# Altium PCB Version_1.PcbDoc
Units mm, origin at the board's own origin, x right, y up, seen from the top; angles counter-clockwise.
Board outline 60.25 x 52.52 mm, 2 copper layers (Top Layer, Bottom Layer); 28 components, 18 nets, 106 pads, 14 vias.
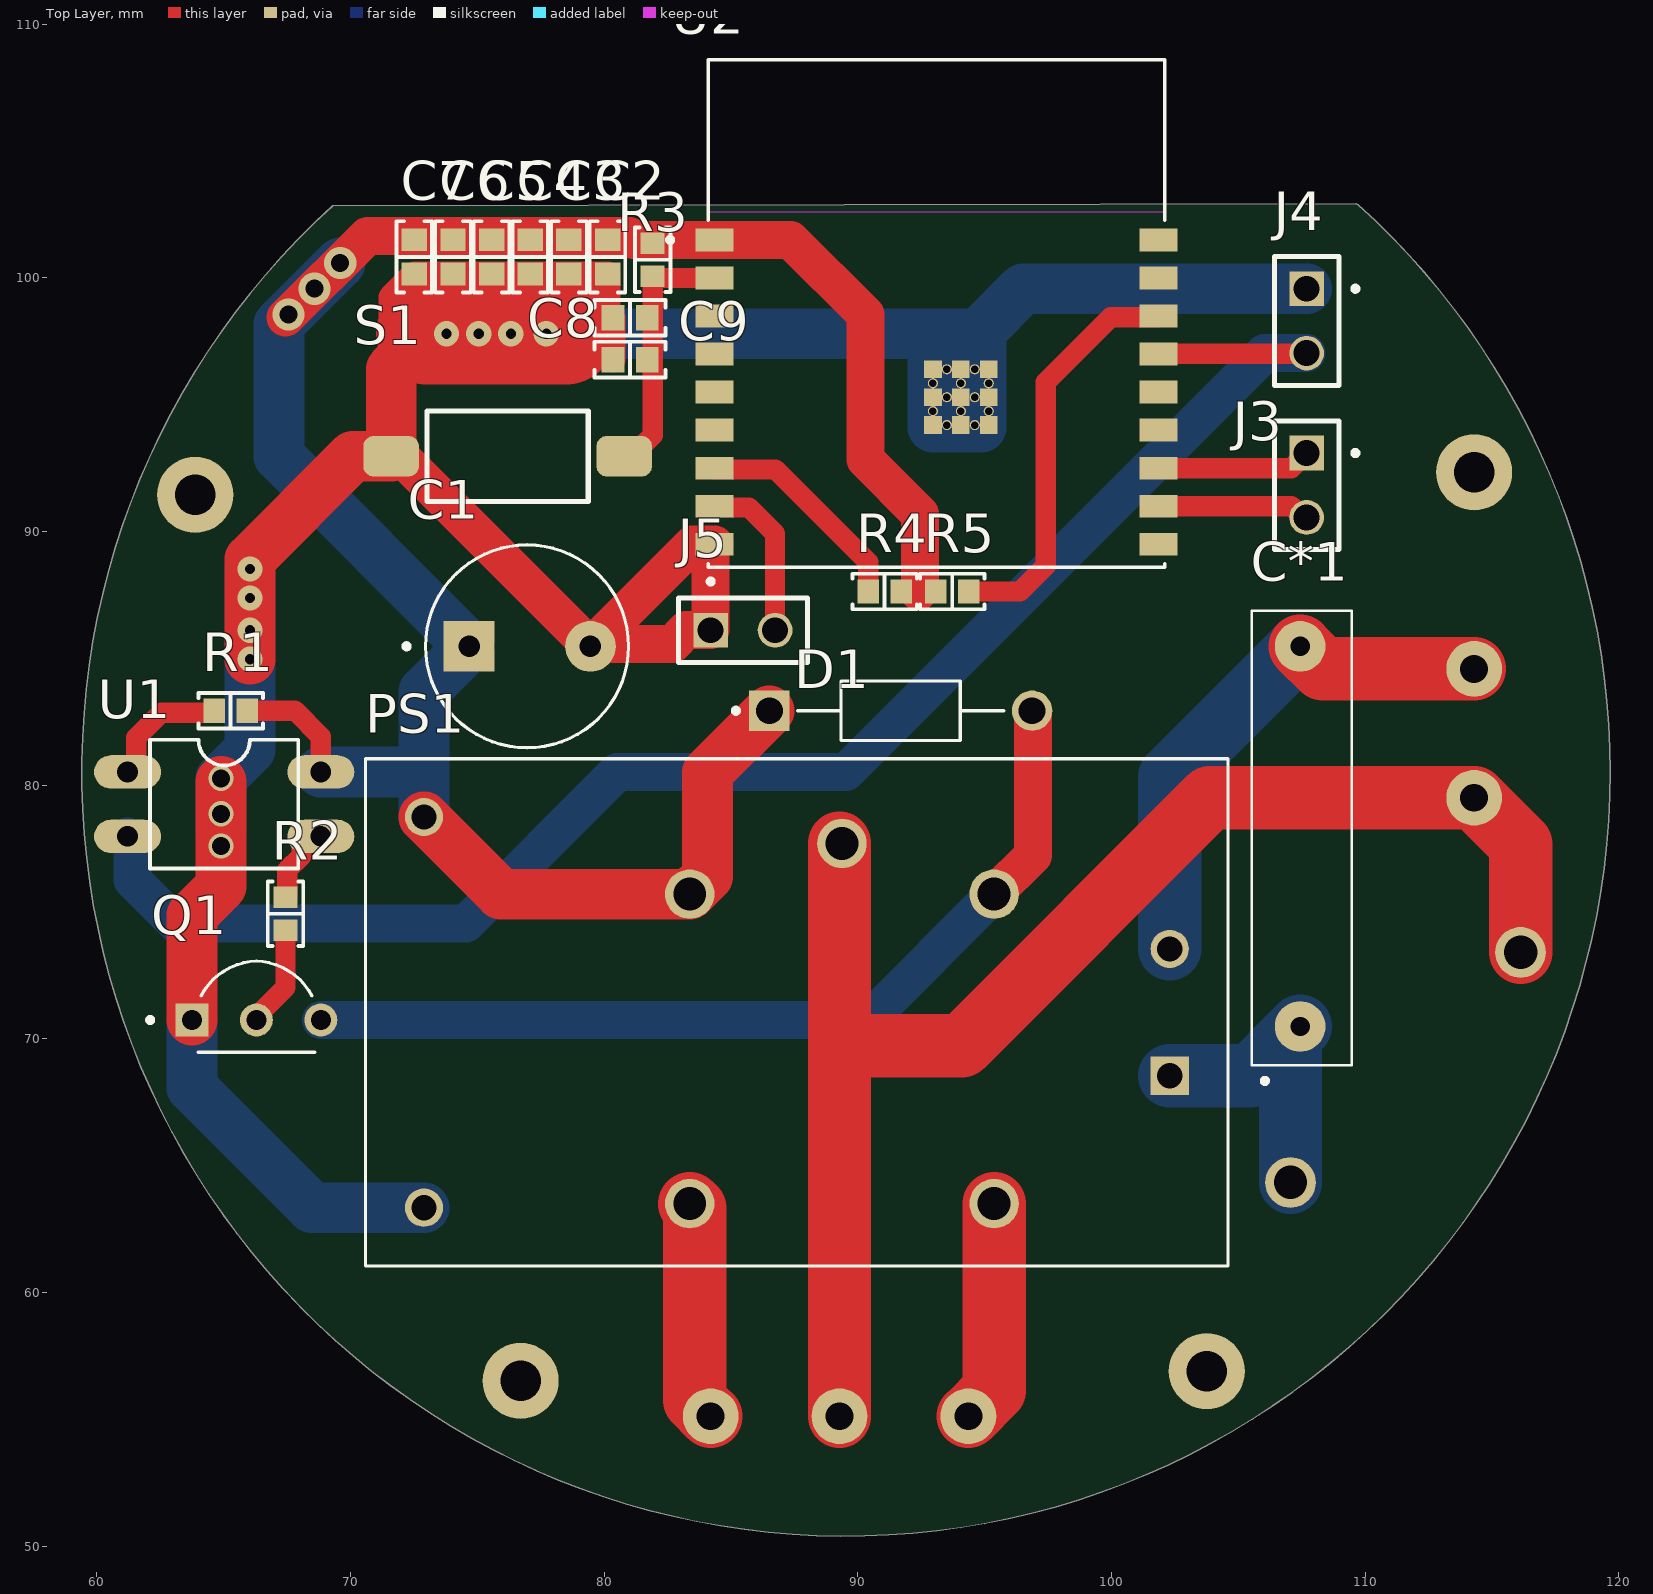
[diagram p0: Top Layer view]
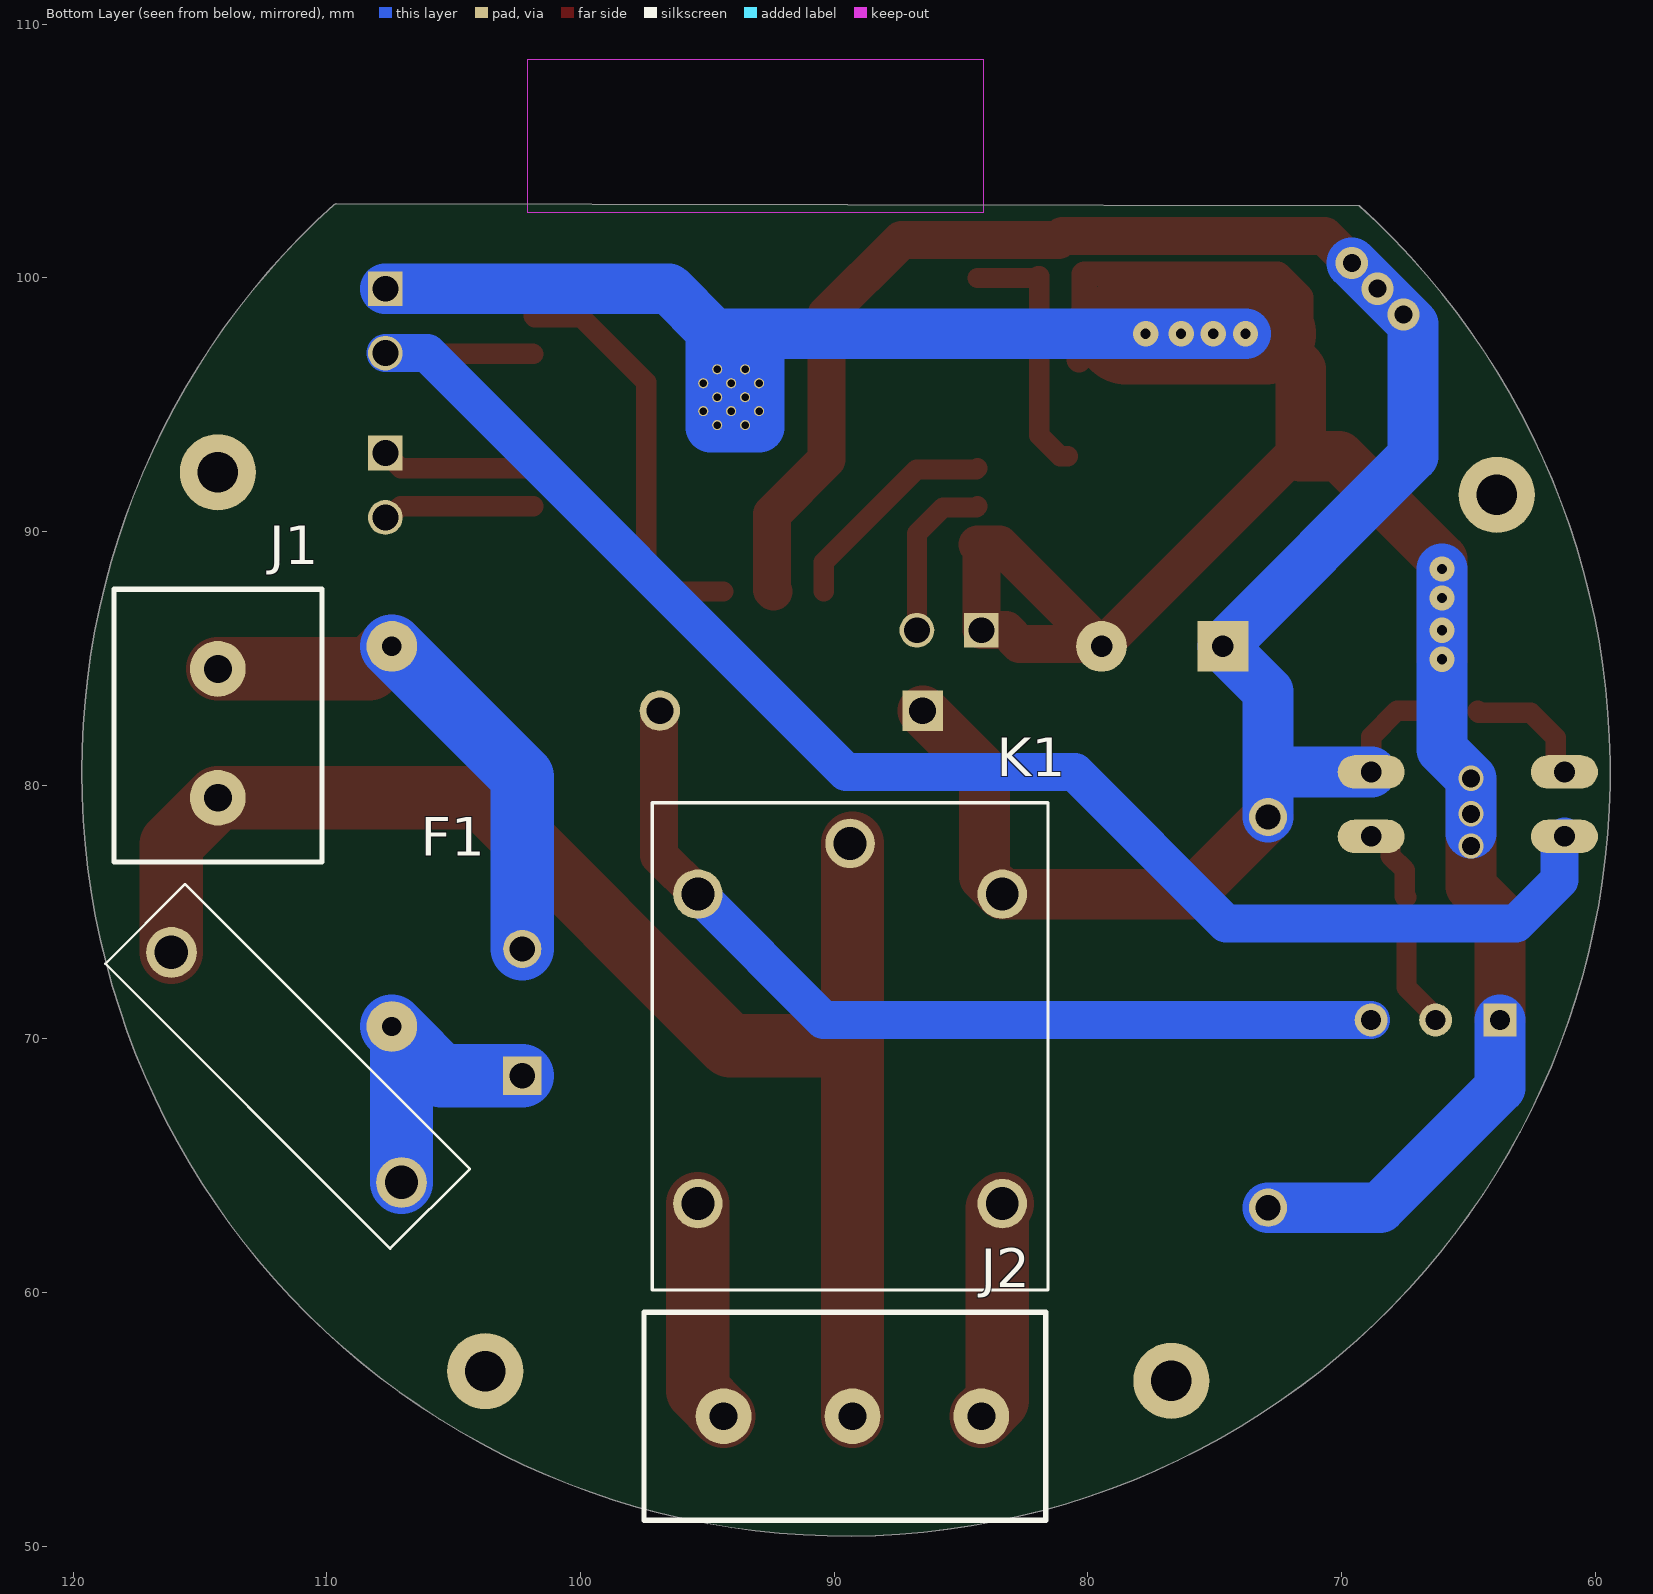
[diagram p1: Bottom Layer view, seen from below]
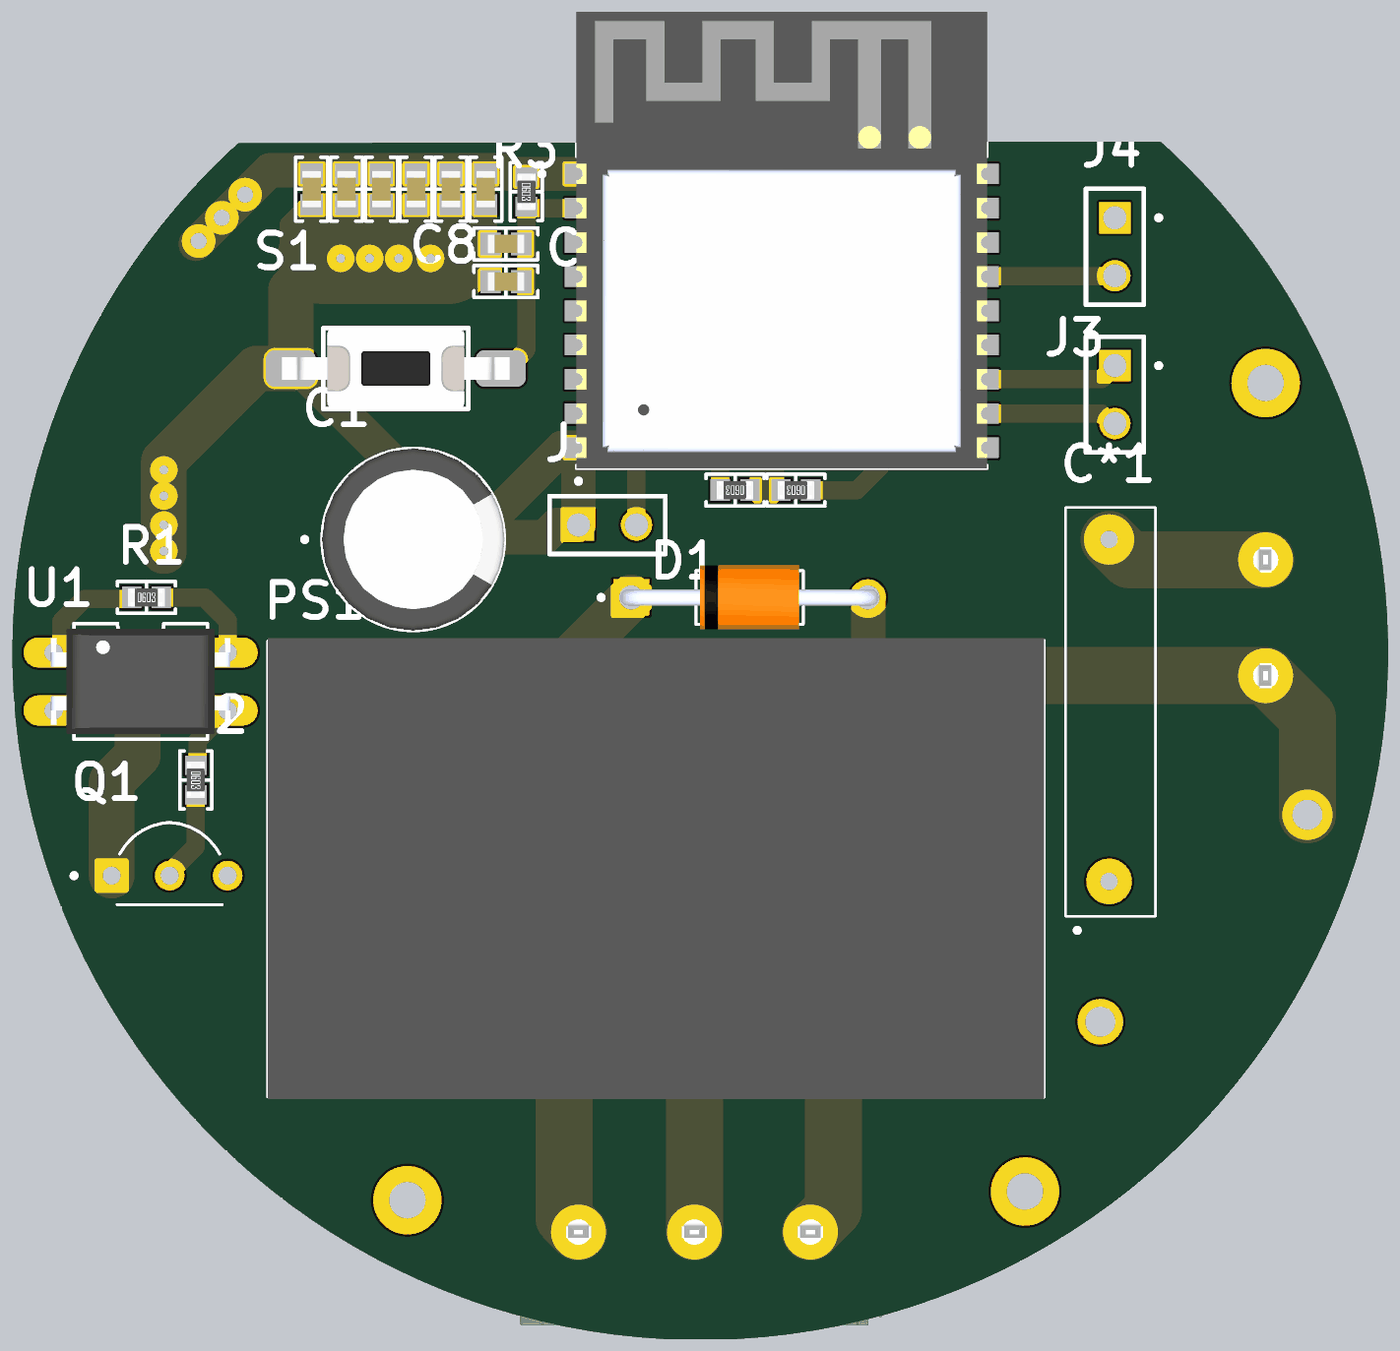
[diagram p2: 3D render of the assembled board from above, using the file's embedded part models]

## Layer stack, top to bottom
Top Solder: solder mask 0.0102, Solder Resist, Dk 3.5
Top Layer: signal copper 0.0356
Dielectric 1: dielectric 0.32, FR-4, Dk 4.8
Bottom Layer: signal copper 0.0356
Bottom Solder: solder mask 0.0102, Solder Resist, Dk 3.5

## Board outline
69.301,102.839 ccw(c89.535,80.518) 119.662,80.518 ccw(c89.535,80.518) 109.722,102.882 109.637,102.915

## Design rules (kind name [scope] priority, off if disabled: settings)
Clearance [All] p1: gap=0.254 ignorepadtopadclearanceinfootprint=FALSE except(0: Arc-Hole Track-Hole SMDPad-Hole THPad-Hole Via-Hole Fill-Hole Poly-Hole Region-Hole Text-Hole)
PolygonConnect [All] p1: connectstyle=Relief reliefconductorwidth=0.254 reliefentries=4 polygonreliefangle="90 Angle" airgapwidth=0.254
RoutingVias [All] p1: holewidth=0.711 width=1.27 viastyle="Through Hole" minholewidth=0.711 minwidth=1.27 maxholewidth=0.711 maxwidth=1.27
SolderMaskExpansion [All] p1: expansion=0.102 istentingtop=FALSE
Width [All] p1: maxlimit=5 minlimit=0.254 preferedwidth=0.6 minimp=50.000000 maximp=50.000000 favimp=50.000000
30 further rules are at their usual default settings.

## Classes and differential pairs
component class Sheet1: C1 C2 C3 C4 C7 C8 C9 C*1 D1 F1 J1 J2 J3 J5 K1 PS1 Q1 R1 R2 R3 R4 R5 S1 U1 U2

## Components (designator, comment, footprint, x,y, rotation, side; value= is the part's Value field where it differs from the comment)
C1 "EEUFS2A330B" CAPPRD500W60D800H1150 76.962,85.471 r0 top
C2 "1 µF" "CAP 0603_1608" 80.137,100.824 r90 top
C3 "1 µF" "CAP 0603_1608" 78.613,100.824 r90 top
C4 "1 µF" "CAP 0603_1608" 77.089,100.824 r90 top
C5 "1 µF" "CAP 0603_1608" 75.565,100.824 r90 top
C6 "1 µF" "CAP 0603_1608" 74.041,100.824 r90 top
C7 "1 µF" "CAP 0603_1608" 72.517,100.824 r90 top
C8 "1 µF" "CAP 0603_1608" 81.026,96.774 r180 top
C9 "1 µF" "CAP 0603_1608" 81.026,98.425 r0 top
C*1 "Capacitance_Filter" Capacitance_Filter 107.315,78.486 r90 top
D1 "1N4001G" DIOAD1036W78L470D235 91.694,82.931 r0 top
F1 "Fuse 4x11" "Fuse 4x11" 112.268,69.723 r225 bottom
J1 "282837-2" "TE 282837-2" 114.3,82.042 r90 bottom
J2 "282837-3" "TE 282837-3" 89.281,55.118 r0 bottom
J3 "TSW-101-23-T-D" SAMTEC_TSW-101-23-T-D 107.696,93.091 r180 top
J4 "TSW-101-23-T-D" SAMTEC_TSW-101-23-T-D 107.696,99.568 r180 top
J5 "TSW-101-23-T-D" SAMTEC_TSW-101-23-T-D 84.201,86.106 r270 top
K1 "SRD-03VDC-SL-C" RELAY_SRD-03VDC-SL-C 89.377,69.7 r270 bottom
PS1 "HLK-PM03" CONV_HLK-PM03 87.598,71.04 r180 top
Q1 "2N2222A" TO92254P470H750-3 66.294,73.069 r0 top
R1 "1 kOhms" "RES 0603_1608" 65.278,82.931 r0 top
R2 "1 kOhms" "RES 0603_1608" 67.437,74.93 r270 top
R3 "10 kOhms" "RES 0603_1608" 81.915,100.711 r270 top
R4 "10 kOhms" "RES 0603_1608" 91.059,87.63 r180 top
R5 "10 kOhms" "RES 0603_1608" 93.726,87.63 r180 top
S1 "FSMSM" "TE FSMSMTR" 76.2,92.964 r270 top
U1 "PC817X3NSZ9F" DIL04 65.024,79.248 r270 top
U2 "ESP32-C3-WROOM-02-N4" "MODULE_ESP32-C3-WROOM-02-H4 - duplicate" 93.104,98.592 r0 top

## Footprints (in the part's own frame and the unit in brackets; to place one, negate y for a bottom-side part, rotate by r counter-clockwise, add the part's x,y. Pads: shape width x height; smd on the part's side, far side on the other; paste and mask are expansions set on the pad)
"CAP 0603_1608" [mm] "Chip Capacitor, 2-Leads, Body 1.60x0.80mm, IPC Medium Density"
  rect 0.9x1 smd: 1(-0.675,0) 2(0.675,0)
  silkscreen extent -1.4,-0.7 1.4,0.7, body extent -0.8,-0.41 0.8,0.41, height 0.82
Capacitance_Filter [mil]
  round 78.74 hole 30: 1(-315,-5) 2(275,-5)
  silkscreen extent -375,-85 330,70
CAPPRD500W60D800H1150 [mm]
  round 2 hole 0.85: N(2.5,0)
  rect 2x2 hole 0.85: P(-2.286,0)
  silkscreen extent -4.85,-4 4,4, body extent -4,-4 4,4, height 11.5
CONV_HLK-PM03 [mm]
  rect 1.508x1.508 / inner round 1.508 / far side rect 1.508x1.508 hole 1: 1(-14.7,2.5)
  round 1.508 hole 1: 2(-14.7,-2.5) 3(14.7,7.7) 4(14.7,-7.7)
  silkscreen extent -18.55,-10 17,10, body extent -17,-10.1 17,10.1, height 20
DIL04 [mil]
  oval 52x104 hole 32: 1(-50,-150) 2(50,-150) 3(50,150) 4(-50,150)
  silkscreen extent -100,-115 100,115, body extent -91,-155 91,155, height 179
DIOAD1036W78L470D235 [mm]
  round 1.59 hole 1.06: A(5.18,0)
  rect 1.59x1.59 hole 1.06: C(-5.18,0)
  silkscreen extent -6.6,-1.17 4.07,1.17, body extent -5.65,-1.4 5.65,1.4, height 2.8
"Fuse 4x11" [mm]
  round 2 hole 1.32: 1(-5.334,-0.127) 2(7.493,-0.127)
  silkscreen extent -6.86,-2.29 9.02,2.16
"MODULE_ESP32-C3-WROOM-02-H4 - duplicate" [mm]
  rect 1.5x0.9 smd: 1(-8.75,2.9) 2(-8.75,1.4) 3(-8.75,-0.1) 4(-8.75,-1.6) 5(-8.75,-3.1) 6(-8.75,-4.6) 7(-8.75,-6.1) 8(-8.75,-7.6) 9(-8.75,-9.1) 10(8.75,-9.1) 11(8.75,-7.6) 12(8.75,-6.1) 13(8.75,-4.6) 14(8.75,-3.1) 15(8.75,-1.6) 16(8.75,-0.1) 17(8.75,1.4) 18(8.75,2.9)
  rect 0.7x0.7 smd: 19(-0.14,-2.2) 20(0.96,-2.2) 21(2.06,-2.2) 22(-0.14,-3.3) 23(0.96,-3.3) 24(2.06,-3.3) 25(-0.14,-4.4) 26(0.96,-4.4) 27(2.06,-4.4)
  round 0.4 hole 0.3 mask+0: 28(0.41,-2.2) 29(1.51,-2.2) 30(-0.14,-2.75) 31(0.96,-2.75) 32(2.06,-2.75) 33(0.41,-3.3) 34(1.51,-3.3) 35(-0.14,-3.85) 36(0.96,-3.85) 37(2.06,-3.85) 38(0.41,-4.4) 39(1.51,-4.4)
  Keep-Out Layer region: 9,4 -9,4 -9,10 9,10
  Keep-Out Layer region: 9,4 -9,4 -9,10 9,10
  silkscreen extent -10.6,-10 9,10, body extent -9,-10 9,10, height 3.35
RELAY_SRD-03VDC-SL-C [mm]
  round 1.95 hole 1.3: COIL1(-6,6) COIL2(-6,-6) COM(-8,0) NC(6.2,6) NO(6.2,-6)
  silkscreen extent -9.6,-7.8 9.6,7.8
"RES 0603_1608" [mm] "Chip Resistor, 2-Leads, Body 1.60x0.80mm, IPC Medium Density"
  rect 0.85x0.95 smd: 1(-0.65,0) 2(0.65,0)
  silkscreen extent -1.27,-0.7 1.27,0.7, body extent -0.8,-0.4 0.8,0.4, height 0.45
SAMTEC_TSW-101-23-T-D [mm]
  rect 1.37x1.37 hole 1.02: 01(0,0)
  round 1.37 hole 1.02: 02(0,2.54)
  silkscreen extent -2.02,-1.27 1.27,3.81
"TE 282837-2" [mm] "Wire to Board Terminal Block Horizontal with Board, 2 Postions, Body 10.76x8.2 mm, Pitch 5.08mm"
  round 2.2 hole 1.1: 1(-2.54,0) 2(2.54,0)
  silkscreen extent -5.08,-4.1 5.68,4.1, body extent -5.08,-4.1 5.68,4.1, height 10.3
"TE 282837-3" [mm] "Wire to Board Terminal Block Horizontal with Board, 3 Postions, Body 15.84x8.2mm, Pitch 5.08mm"
  round 2.2 hole 1.1: 1(-5.08,0) 2(0,0) 3(5.08,0)
  silkscreen extent -7.62,-4.1 8.22,4.1, body extent -7.62,-4.1 8.22,4.1, height 10.3
"TE FSMSMTR" [mm]
  rrect50% 1.6x2.19 smd: 1(0,4.595) 2(0,-4.595)
  silkscreen extent -1.78,-3.18 1.78,3.18, body extent -1.75,-4.98 1.75,4.98, height 4.42
TO92254P470H750-3 [mm]
  rect 1.298x1.298 / inner round 1.298 / far side rect 1.298x1.298 hole 0.79: 1(-2.54,-2.33)
  round 1.298 hole 0.79: 2(0,-2.33) 3(2.54,-2.33)
  silkscreen extent -4.29,-3.6 2.3,0

## Part data
C1: "CAP ALUM 33UF 20% 100V THRU HOLE", Package="RADIAL-2 Panasonic", Availability="In Stock", Check_prices=https://www.snapeda.com/parts/EEUFS2A330B/Panasonic/view-part/5795625/?ref=eda, MF=Panasonic, MP=EEUFS2A330B, Price=None, SnapEDA_Link=https://www.snapeda.com/parts/EEUFS2A330B/Panasonic/view-part/5795625/?ref=snap
C2: library part C0603C105K4RACAUTO, "CAP CER 1UF 16V X7R 0603", Capacitance="10 µF", Device Package="0603 (1608 Metric)", Manufacturer=KEMET, Operating Temperature="-55°C ~ 125°C", Ratings=AEC-Q200, Supplier Part Number 1=399-17704-1-ND, Temperature Coefficient=X7R, Tolerance=±10%, Voltage - Rated=16V, Applications="Automotive, Bypass, Decoupling", ComponentLink1Description=Datasheet, ComponentLink1URL=https://api.kemet.com/component-edge/download/datasheet/C0603C105K4RACAUTO.pdf, ComponentLink2Description="DigiKey Link", ComponentLink2URL=https://www.digikey.com/en/products/detail/kemet/C0603C105K4RACAUTO/8635831, LastUpdated="9.02.2024 20:10:30", Lifecycle Status=Active, Minimum Order=1, Mounting Type="Surface Mount, MLCC", Package / Case="0603 (1608 Metric)", Packaging=TapeAndReel, Part Number=C0603C105K4RACAUTO, Part Status=Active, partid=2179, Price=0.01, Series="SMD Auto X7R", Size / Dimension="0.063\" L x 0.031\" W (1.60mm x 0.80mm)", Supplier 1=DigiKey, Thickness (Max)="0.037\" (0.95mm)"
C3: library part C0603C105K4RACAUTO, "CAP CER 1UF 16V X7R 0603", Capacitance="0.1 µF", Device Package="0603 (1608 Metric)", Manufacturer=KEMET, Operating Temperature="-55°C ~ 125°C", Ratings=AEC-Q200, Supplier Part Number 1=399-17704-1-ND, Temperature Coefficient=X7R, Tolerance=±10%, Voltage - Rated=16V, Applications="Automotive, Bypass, Decoupling", ComponentLink1Description=Datasheet, ComponentLink1URL=https://api.kemet.com/component-edge/download/datasheet/C0603C105K4RACAUTO.pdf, ComponentLink2Description="DigiKey Link", ComponentLink2URL=https://www.digikey.com/en/products/detail/kemet/C0603C105K4RACAUTO/8635831, LastUpdated="9.02.2024 20:10:30", Lifecycle Status=Active, Minimum Order=1, Mounting Type="Surface Mount, MLCC", Package / Case="0603 (1608 Metric)", Packaging=TapeAndReel, Part Number=C0603C105K4RACAUTO, Part Status=Active, partid=2179, Price=0.01, Series="SMD Auto X7R", Size / Dimension="0.063\" L x 0.031\" W (1.60mm x 0.80mm)", Supplier 1=DigiKey, Thickness (Max)="0.037\" (0.95mm)"
C4 C5 C6 C7: library part C0603C105K4RACAUTO, "CAP CER 1UF 16V X7R 0603", Capacitance=TBD, Device Package="0603 (1608 Metric)", Manufacturer=KEMET, Operating Temperature="-55°C ~ 125°C", Ratings=AEC-Q200, Supplier Part Number 1=399-17704-1-ND, Temperature Coefficient=X7R, Tolerance=±10%, Voltage - Rated=16V, Applications="Automotive, Bypass, Decoupling", ComponentLink1Description=Datasheet, ComponentLink1URL=https://api.kemet.com/component-edge/download/datasheet/C0603C105K4RACAUTO.pdf, ComponentLink2Description="DigiKey Link", ComponentLink2URL=https://www.digikey.com/en/products/detail/kemet/C0603C105K4RACAUTO/8635831, LastUpdated="9.02.2024 20:10:30", Lifecycle Status=Active, Minimum Order=1, Mounting Type="Surface Mount, MLCC", Package / Case="0603 (1608 Metric)", Packaging=TapeAndReel, Part Number=C0603C105K4RACAUTO, Part Status=Active, partid=2179, Price=0.01, Series="SMD Auto X7R", Size / Dimension="0.063\" L x 0.031\" W (1.60mm x 0.80mm)", Supplier 1=DigiKey, Thickness (Max)="0.037\" (0.95mm)"
C8: library part C0603C105K4RACAUTO, "CAP CER 1UF 16V X7R 0603", Device Package="0603 (1608 Metric)", Manufacturer=KEMET, Operating Temperature="-55°C ~ 125°C", Ratings=AEC-Q200, Supplier Part Number 1=399-17704-1-ND, Temperature Coefficient=X7R, Tolerance=±10%, Voltage - Rated=16V, Applications="Automotive, Bypass, Decoupling", Capacitance="1 µF", ComponentLink1Description=Datasheet, ComponentLink1URL=https://api.kemet.com/component-edge/download/datasheet/C0603C105K4RACAUTO.pdf, ComponentLink2Description="DigiKey Link", ComponentLink2URL=https://www.digikey.com/en/products/detail/kemet/C0603C105K4RACAUTO/8635831, LastUpdated="9.02.2024 20:10:30", Lifecycle Status=Active, Minimum Order=1, Mounting Type="Surface Mount, MLCC", Package / Case="0603 (1608 Metric)", Packaging=TapeAndReel, Part Number=C0603C105K4RACAUTO, Part Status=Active, partid=2179, Price=0.01, Series="SMD Auto X7R", Size / Dimension="0.063\" L x 0.031\" W (1.60mm x 0.80mm)", Supplier 1=DigiKey, Thickness (Max)="0.037\" (0.95mm)"
C9: library part C0603C105K4RACAUTO, "CAP CER 1UF 16V X7R 0603", Capacitance=0.1uF, Device Package="0603 (1608 Metric)", Manufacturer=KEMET, Operating Temperature="-55°C ~ 125°C", Ratings=AEC-Q200, Supplier Part Number 1=399-17704-1-ND, Temperature Coefficient=X7R, Tolerance=±10%, Voltage - Rated=16V, Applications="Automotive, Bypass, Decoupling", ComponentLink1Description=Datasheet, ComponentLink1URL=https://api.kemet.com/component-edge/download/datasheet/C0603C105K4RACAUTO.pdf, ComponentLink2Description="DigiKey Link", ComponentLink2URL=https://www.digikey.com/en/products/detail/kemet/C0603C105K4RACAUTO/8635831, LastUpdated="9.02.2024 20:10:30", Lifecycle Status=Active, Minimum Order=1, Mounting Type="Surface Mount, MLCC", Package / Case="0603 (1608 Metric)", Packaging=TapeAndReel, Part Number=C0603C105K4RACAUTO, Part Status=Active, partid=2179, Price=0.01, Series="SMD Auto X7R", Size / Dimension="0.063\" L x 0.031\" W (1.60mm x 0.80mm)", Supplier 1=DigiKey, Thickness (Max)="0.037\" (0.95mm)"
D1: "1A, 50V, Standard Recovery Rectifier", Package="DO-41-2 Taiwan Semiconductor", Availability="In Stock", Check_prices=https://www.snapeda.com/parts/1N4001G/Taiwan+Semiconductor/view-part/?ref=eda, MF="Taiwan Semiconductor", MP=1N4001G, Price=None, Purchase-URL=https://pricing.snapeda.com/search/part/1N4001G/?ref=eda, SnapEDA_Link=https://www.snapeda.com/parts/1N4001G/Taiwan+Semiconductor/view-part/?ref=snap
J1: "TERM BLK 2P SIDE ENT 5.08MM PCB", Color=Green, Current="13.5 A", Manufacturer="TE Connectivity AMP Connectors", Supplier Part Number 1=A113320-ND, Voltage="300 V", ComponentLink1Description=Datasheet, ComponentLink1URL=https://www.te.com/commerce/DocumentDelivery/DDEController?Action=srchrtrv&DocNm=282837&DocType=Customer+Drawing&DocLang=English, ComponentLink2Description="DigiKey Link", ComponentLink2URL=https://www.digikey.com/en/products/detail/te-connectivity-amp-connectors/282837-2/2187973, Features="Interlocking (Side)", LastUpdated="21.06.2022 15:00:23", Lifecycle Status=Active, Mating Orientation="Horizontal with Board", Minimum Order=1, Mounting Type="Through Hole", Number of Levels=1, Packaging=Tray, Part Number=282837-2, Part Status=Active, Pitch="0.200\" (5.08mm)", Positions Per Level=2, Price=0.31, Series=Buchanan, Supplier 1=DigiKey, Wire Gauge="16-28 AWG", Wire Termination="Screw - Rising Cage Clamp"
J2: "TERM BLK 3P SIDE ENT 5.08MM PCB", Color=Green, Current="13.5 A", Manufacturer="TE Connectivity AMP Connectors", Supplier Part Number 1=A113321-ND, Voltage="300 V", ComponentLink1Description=Datasheet, ComponentLink1URL=https://www.te.com/commerce/DocumentDelivery/DDEController?Action=srchrtrv&DocNm=282837&DocType=Customer+Drawing&DocLang=English, ComponentLink2Description="DigiKey Link", ComponentLink2URL=https://www.digikey.com/en/products/detail/te-connectivity-amp-connectors/282837-3/2187974, Features="Interlocking (Side)", LastUpdated="21.06.2022 15:00:39", Lifecycle Status=Active, Mating Orientation="Horizontal with Board", Minimum Order=1, Mounting Type="Through Hole", Number of Levels=1, Packaging=Tray, Part Number=282837-3, Part Status=Active, Pitch="0.200\" (5.08mm)", Positions Per Level=3, Price=0.47, Series=Buchanan, Supplier 1=DigiKey, Wire Gauge="16-28 AWG", Wire Termination="Screw - Rising Cage Clamp"
J3 J4 J5: "TSW Series .100 Terminal Strip", Package=None, Availability=Bad, MF=Samtec, MP=TSW-101-23-T-D, Price=None, SnapEDA_Link=https://www.snapeda.com/parts/TSW-101-23-T-D/Samtec/view-part/3473100/?ref=snap
  J3: System=connector
K1: "Relays General Purpose Non Latching 3VDC SPDT 10A (250VAC) Max 5PIN", Package=Package, Availability="Not in stock", Check_prices=https://www.snapeda.com/parts/SRD-03VDC-SL-C/Songle+Relay/view-part/?ref=eda, MF="Songle Relay", MP=SRD-03VDC-SL-C, Price=None, SnapEDA_Link=https://www.snapeda.com/parts/SRD-03VDC-SL-C/Songle+Relay/view-part/?ref=snap
PS1: Package=Package, Availability="Not in stock", Check_prices=https://www.snapeda.com/parts/HLK-PM03/Hi-link/view-part/?ref=eda, MF=Hi-link, MP=HLK-PM03, Price=None, SnapEDA_Link=https://www.snapeda.com/parts/HLK-PM03/Hi-link/view-part/?ref=snap
Q1: "Bipolar (BJT) Transistor NPN 40 V 600 mA 250MHz 625 mW Through Hole TO-92", Package="TO-92-3 Diotec", Availability="In Stock", Check_prices=https://www.snapeda.com/parts/2N2222A/Diotec/view-part/?ref=eda, MF="Diotec Semiconductor", MP=2N2222A, Price=None, Purchase-URL=https://pricing.snapeda.com/search/part/2N2222A/?ref=eda, SnapEDA_Link=https://www.snapeda.com/parts/2N2222A/Diotec/view-part/?ref=snap
R1 R2 R3 R4 R5: library part ERJ-PB3D4642V, "RES SMD 46.4K OHM 0.5% 1/5W 0603", Device Package="0603 (1608 Metric)", Manufacturer="Panasonic Electronic Components", Operating Temperature="-55°C ~ 155°C", Power (Watts)="0.2W, 1/5W", Ratings=AEC-Q200, Resistance="46.4 kOhms", Supplier Device Package=0603, Supplier Part Number 1=P20472CT-ND, Temperature Coefficient=±50ppm/°C, Tolerance=±0.5%, ComponentLink1Description=Datasheet, ComponentLink1URL=https://industrial.panasonic.com/cdbs/www-data/pdf/RDM0000/AOA0000C328.pdf, ComponentLink2Description="DigiKey Link", ComponentLink2URL=https://www.digikey.com/en/products/detail/panasonic-electronic-components/ERJ-PB3D4642V/6213255, Composition="Thick Film", Features="Automotive AEC-Q200, Pulse Withstanding", Height - Seated (Max)="0.022\" (0.55mm)", LastUpdated="9.02.2024 20:43:36", Lifecycle Status=Active, Minimum Order=1, Number of Terminations=2, Package / Case="0603 (1608 Metric)", Packaging=TapeAndReel, Part Number=ERJ-PB3D4642V, Part Status=Active, partid=5056, Price=0.02, Series=ERJ-PB3, Size / Dimension="0.063\" L x 0.031\" W (1.60mm x 0.80mm)", Supplier 1=DigiKey
S1: "SWITCH TACTILE SPST-NO 0.05A 24V", Contact Rating @ Voltage="0.05A @ 24VDC", Manufacturer="TE Connectivity ALCOSWITCH Switches", Operating Force=180gf, Operating Temperature="-35°C ~ 85°C", Supplier Part Number 1=450-1140-ND, Actuator Height off PCB, Vertical=4.57mm, Actuator Orientation="Top Actuated", Actuator Type=Standard, Circuit=SPST-NO, ComponentLink1Description=Datasheet, ComponentLink1URL=https://www.te.com/commerce/DocumentDelivery/DDEController?Action=srchrtrv&DocNm=1437566-3&DocType=Customer+Drawing&DocLang=English, ComponentLink2Description="DigiKey Link", ComponentLink2URL=https://www.digikey.com/en/products/detail/te-connectivity-alcoswitch-switches/FSMSM/525812, LastUpdated="3.06.2024 20:19:35", Lifecycle Status=Active, Minimum Order=1, Mounting Type="Surface Mount", Outline="6.00mm x 3.50mm", Packaging=Bulk, Part Number=FSMSM, Part Status=Active, Price=0.17, Series=FSMSM, Supplier 1=DigiKey, Switch Function=Off-Mom, Termination Style="Gull Wing", Illumination=Non-Illuminated
U1: "Optoisolator Transistor Output 5000Vrms 1 Channel 4-DIP", Package="DIP-4 Sharp Microelectronics", Check_prices=https://www.snapeda.com/parts/PC817X3NSZ9F/Sharp+Microelectronics/view-part/?ref=eda, MF="Sharp Microelectronics", MP=PC817X3NSZ9F, SnapEDA_Link=https://www.snapeda.com/parts/PC817X3NSZ9F/Sharp+Microelectronics/view-part/?ref=snap
U2: "WiFi Modules (802.11) (Engineering Samples) SMD module, ESP32-C3, 4MB SPI flash, PCB antenna, -40 C +85 C", Package=Package, Availability="In Stock", Check_prices=https://www.snapeda.com/parts/ESP32-C3-WROOM-02-N4/Espressif+Systems/view-part/?ref=eda, MF="Espressif Systems", MP=ESP32-C3-WROOM-02-N4, Price=None, Purchase-URL=https://pricing.snapeda.com/search/part/ESP32-C3-WROOM-02-N4/?ref=eda, SnapEDA_Link=https://www.snapeda.com/parts/ESP32-C3-WROOM-02-N4/Espressif+Systems/view-part/?ref=snap

## Free pads (board coordinates)
  round 3 hole 1.6 unplated: 2(114.3,92.329) 3(63.881,91.44) 4(76.708,56.515) 5(103.759,56.896)

## Via types
v1: diameter 1, hole 0.4, Top Layer to Bottom Layer, 8 vias
v2: diameter 1, hole 0.711, Top Layer to Bottom Layer, 3 vias
v3: diameter 1.27, hole 0.711, Top Layer to Bottom Layer, 3 vias

## Nets (pads, with @x,y where several pads share a name; then routed paths per layer and width w, separated by ;. In a path a pad name is that pad's centre, name@x,y a point inside that pad or via, vN(x,y) a via of type N, cw(c..) or ccw(c..) an arc to the next point about the centre after c; other vN are vias at no path point)
+3.3V: C1.P C2.2 C3.2 C4.2 C5.2 C6.2 C7.2 D1.C K1.COIL1 PS1.4 R1.2 R3.1 R4.1 R5.2 U1.4 U2.1 | length 93.1
  Top Layer w0.8: R1.2 67.818,82.931 68.834,81.915 68.834,80.759 U1.4
  Top Layer w1.5: v3@67.437,98.425 70.665,101.653 74.041,101.653 80.137,101.653 81.003,101.653 81.164,101.492 U2.1 87.357,101.492 90.297,98.552 90.297,92.837 92.456,90.678 92.456,87.693 92.393,87.63
  Top Layer w2: PS1.4 75.938,75.7 K1.COIL1 84.074,76.397 84.074,80.491 D1.C
  Bottom Layer w1.5: 72.771,80.518 72.898,80.645
  Bottom Layer w2: U1.4 72.771,80.518 ; v3(69.596,100.584) 67.183,98.171 67.183,92.964 C1.P 72.898,83.693 72.898,80.645 PS1.4
  other v3: 67.564,98.552 68.58,99.568
EN: C8.1 C9.2 R3.2 S1.1 U2.2 | length 10.2
  Top Layer w0.8: S1.1 81.09,92.964 81.915,93.789 R3.2 81.965,100.061 82.034,99.992 U2.2
FAZ: F1.1 J1.1 J2.2 K1.COM | length 58.5
  Top Layer w2.5: J2.2 89.281,69.723 ; K1.COM@89.281,77.7 89.281,69.723 ; F1.1 116.13,77.672 J1.1 103.886,79.502 94.107,69.723 89.281,69.723
GND: C1.N C2.1 C3.1 C4.1 C5.1 C6.1 C7.1 C8.2 C9.1 J4.01 J5.01 PS1.3 Q1.1 S1.2 U2.9 U2.19 U2.20 U2.21 U2.22 U2.23 U2.24 U2.25 U2.26 U2.27 U2.28 U2.29 U2.30 U2.31 U2.32 U2.33 U2.34 U2.35 U2.36 U2.37 U2.38 U2.39 | length 139.8
  Top Layer w1: 71.605,97.79 71.605,99.237 C7.1 C6.1 C5.1 C4.1 C3.1 C2.1 C9.1@80.137,98.425 ; C8.2 C9.1
  Top Layer w1.5: S1.2 71.655,92.914 72.019,92.914 C1.N C1.N@79.558,85.567 ; C1.N@79.558,85.567 83.483,89.492 U2.9 84.201,89.339 J5.01 83.232,86.106 82.693,85.567 C1.N@79.558,85.567
  Top Layer w2: Q1.1 63.754,74.867 64.897,76.01 v2@64.897,80.137 ; v1(66.04,84.963) v1(66.04,88.519) 66.04,88.9 70.104,92.964 S1.2 71.605,96.395 73,97.79
  Top Layer w4: 73,97.79 v1(75.057,97.79) v1(76.327,97.79) v1(77.724,97.79) 78.486,97.79 78.613,97.917
  Bottom Layer w2: Q1.1 63.754,68.072 68.486,63.34 PS1.3 ; 64.897,78.105 v2(64.897,80.264) 66.04,81.407 v1(66.04,88.519) ; v1(73.787,97.79) v1(77.724,97.79) 94.742,97.79 94.869,97.917 ; 92.964,97.155 U2.30 U2.35 92.964,94.107 94.869,94.107 94.869,97.917 ; J4.01 96.52,99.568 94.869,97.917
  other v1: 66.04,86.106 66.04,87.376
  other v2: 64.897,77.597 64.897,78.867
IO9: J5.02 U2.8 | length 6.6
  Top Layer w0.8: U2.8 84.404,90.942 85.715,90.942 86.741,89.916 J5.02
NetC*1_1: C*1.1 F1.2 PS1.1 | length 11.7
  Bottom Layer w2.5: PS1.1 105.497,68.54 C*1.1@107.059,70.102 ; F1.2 C*1.1@107.059,70.102 ; C*1.1 C*1.1@107.059,70.102
NetD1_A: D1.A K1.COIL2 Q1.3 | length 36.5
  Top Layer w1: D1.A D1.A@96.901,82.904
  Top Layer w1.5: K1.COIL2 96.901,77.224 96.901,82.88 96.891,82.889 96.891,82.894 D1.A@96.901,82.904
  Bottom Layer w1.5: Q1.3 90.416,70.739 K1.COIL2
NetJ2_1: J2.1 K1.NC | length 8.7
  Top Layer w2.5: K1.NC 83.566,63.311 83.566,55.753 J2.1
NetJ2_3: J2.3 K1.NO | length 8.8
  Top Layer w2.5: J2.3 95.377,56.134 K1.NO
NetJ4_02: J4.02 U1.2 U2.15 | length 64
  Top Layer w0.8: U2.15 101.872,97.01 107.678,97.01 J4.02
  Bottom Layer w1.5: U1.2 61.304,77.888 61.404,77.888 61.404,76.264 63.119,74.549 74.549,74.549 80.518,80.518 89.535,80.518 106.045,97.028 J4.02
NetQ1_2: Q1.2 R2.2 | length 4
  Top Layer w0.8: Q1.2 66.294,70.874 67.437,72.017 R2.2
NetR1_1: R1.1 U1.1 | length 5.1
  Top Layer w0.8: U1.1 61.311,80.518 61.552,80.759 61.552,81.872 62.536,82.856 64.603,82.856 64.628,82.881 R1.1
NetR2_1: R2.1 U1.3 | length 3.3
  Top Layer w0.8: R2.1 67.487,75.58 67.512,75.605 67.512,76.656 68.074,77.218 68.074,77.737 68.315,77.978 U1.3
NetR4_2: R4.2 U2.7 | length 8.7
  Top Layer w0.8: U2.7 84.404,92.442 86.755,92.442 90.409,88.788 R4.2
NetR5_1: R5.1 U2.16 | length 16.2
  Top Layer w0.8: R5.1 96.393,87.63 97.409,88.646 97.409,95.885 99.966,98.442 101.804,98.442 U2.16
NOTR: C*1.2 J1.2 PS1.2 | length 21.3
  Top Layer w2.5: C*1.2 108.331,84.582 J1.2
  Bottom Layer w2.5: PS1.2 102.298,80.327 C*1.2
RX: J3.02 U2.11 | length 6
  Top Layer w0.8: U2.11 107.101,90.992 107.542,90.551 J3.02
TX: J3.01 U2.12 | length 6.1
  Top Layer w0.8: U2.12 107.097,92.492 J3.01
pads on no net: U2.3 U2.4 U2.5 U2.6 U2.10 U2.13 U2.14 U2.17 U2.18

## Silkscreen, mask and mechanical layers (free items; w line width, h text height)
Mechanical 13:
  lines w0.254: 69.387,102.745 ccw(c89.535,80.518) 109.637,102.787 69.46,102.787